# Altium PCB PCB1.PcbDoc
Units mm, origin at the board's own origin, x right, y up, seen from the top; angles counter-clockwise.
Board outline 49.15 x 37.72 mm, 2 copper layers (Top Layer, Bottom Layer); 17 components, 15 nets, 62 pads, 5 vias.
Unrouted connection lines stored in the file: 6.
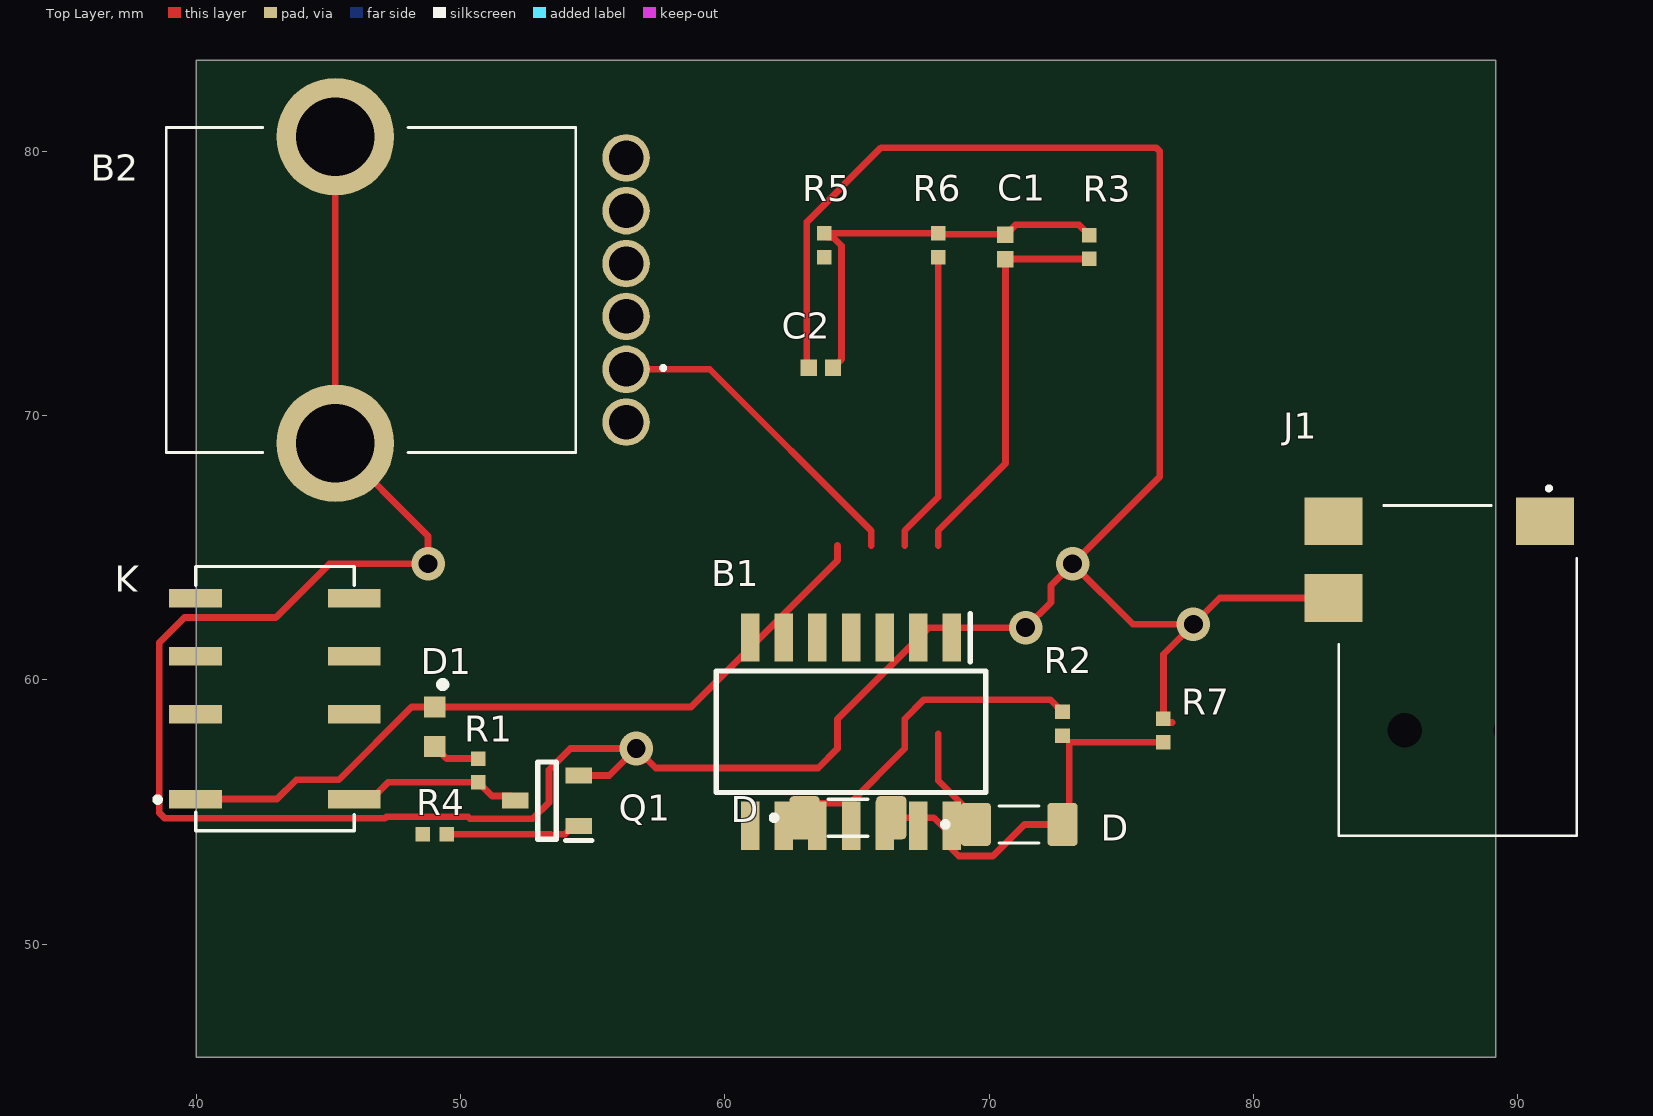
[diagram p0: Top Layer view]
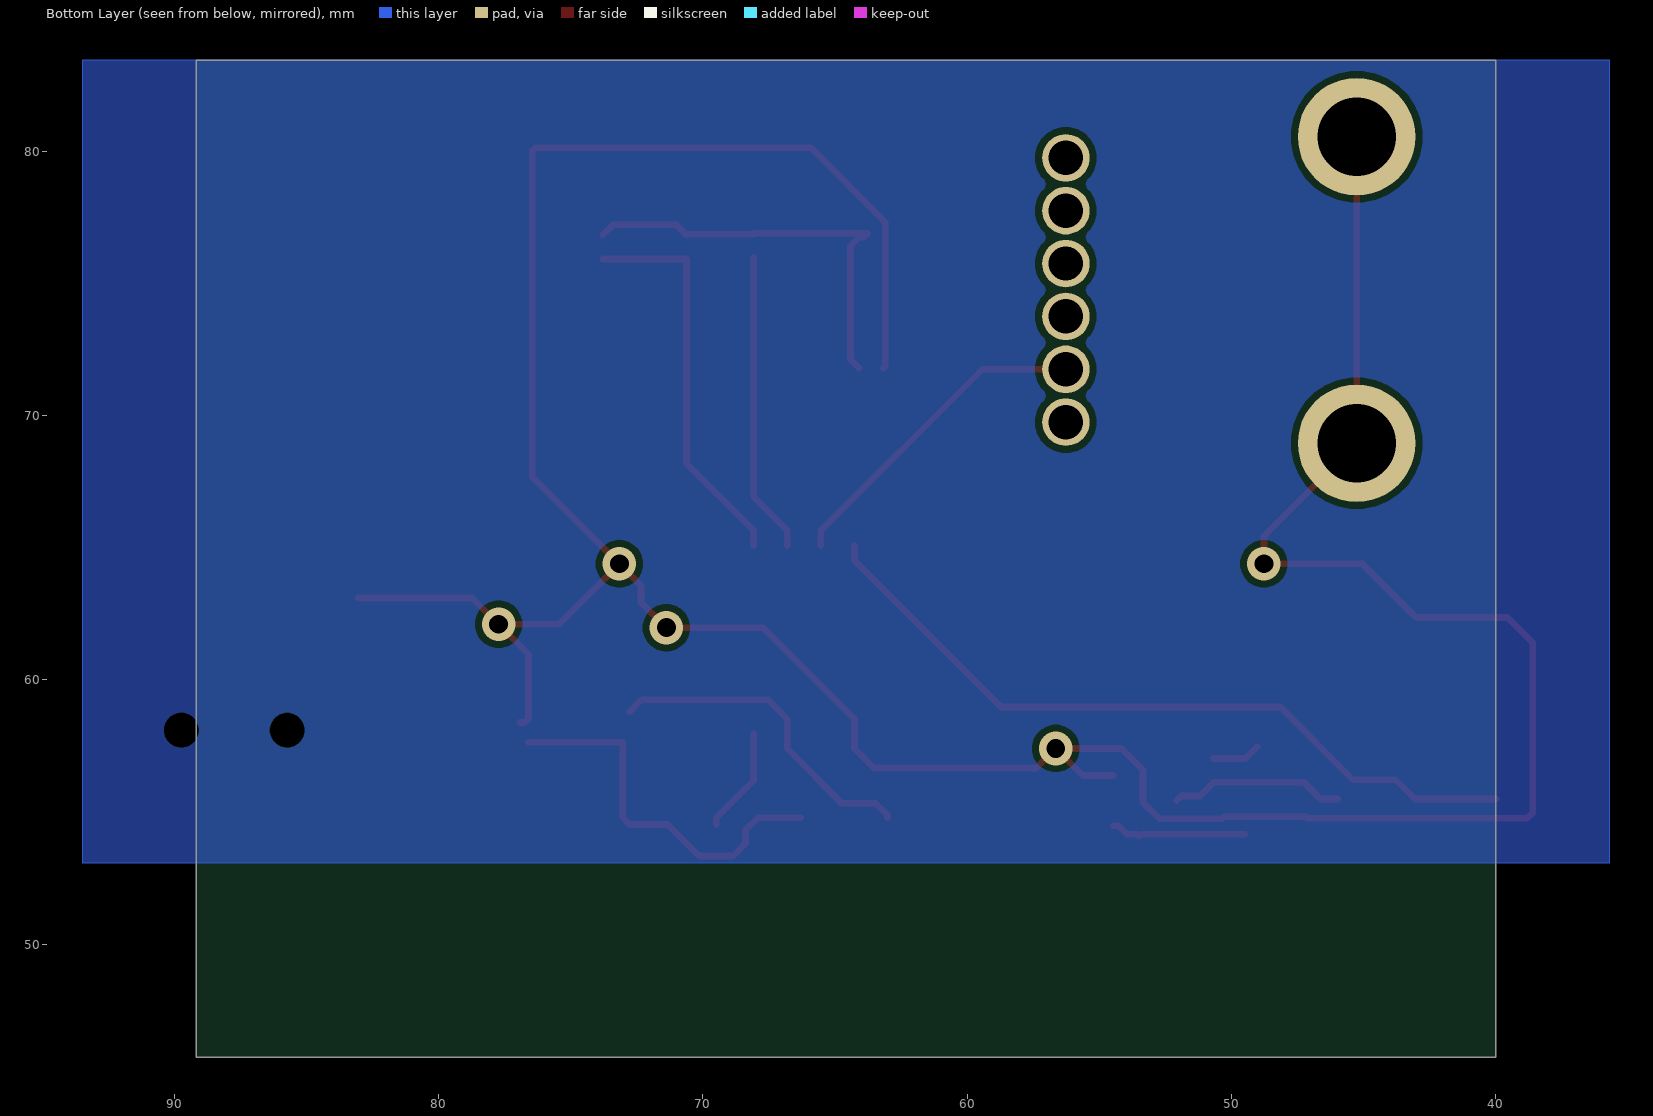
[diagram p1: Bottom Layer view, seen from below]

## Layer stack, top to bottom
Top Solder: solder mask 0.0102, Solder Resist, Dk 3.5
Top Layer: signal copper 0.0356
Dielectric 1: dielectric 0.32, FR-4, Dk 4.8
Bottom Layer: signal copper 0.0356
Bottom Solder: solder mask 0.0102, Solder Resist, Dk 3.5

## Board outline
40.005,45.72 40.005,83.439 89.154,83.439 89.154,45.72

## Design rules (kind name [scope] priority, off if disabled: settings)
Clearance [All] p1: gap=0.254 ignorepadtopadclearanceinfootprint=FALSE except(0: Arc-Hole Track-Hole SMDPad-Hole THPad-Hole Via-Hole Fill-Hole Poly-Hole Region-Hole Text-Hole; 0.258: Arc-Via Track-Via; 0.26: Arc-Fill Arc-Poly Arc-Region Track-Fill Track-Poly Track-Region; 0.3: Arc-Arc Arc-Track Track-Track)
PolygonConnect [All] p1: connectstyle=Relief reliefconductorwidth=0.254 reliefentries=4 polygonreliefangle="90 Angle" airgapwidth=0.254
RoomDefinition Sheet1 [InComponentClass('Sheet1')] p1: confinementstyle=ConfineIn formatcopy=TRUE lockcomponents=FALSE outline 35.745,53.203 93.599,53.203 93.599,83.566 35.745,83.566
RoutingVias [All] p1: holewidth=0.711 width=1.27 viastyle="Through Hole" minholewidth=0.711 minwidth=1.27 maxholewidth=0.711 maxwidth=1.27
SolderMaskExpansion [All] p1: expansion=0.102 istentingtop=FALSE
SupplyNets "Schematic Supply Nets_4" [InNet('GND')] p1: voltage=0.000
SupplyNets "Schematic Supply Nets_3" [InNet('+5')] p2: voltage=0.000
SupplyNets "Schematic Supply Nets_2" [InNet('VCC')] p3: voltage=0.000
SupplyNets "Schematic Supply Nets_1" [InNet('V')] p4: voltage=0.000
SupplyNets "Schematic Supply Nets" [InNet('VIN')] p5: voltage=0.000
Width [All] p1: maxlimit=0.254 minlimit=0.254 preferedwidth=0.254
30 further rules are at their usual default settings.

## Classes and differential pairs
component class Sheet1: B1 B2 C1 C2 D D1 J1 K Q1 R1 R2 R3 R4 R5 R6 R7

## Components (designator, comment, footprint, x,y, rotation, side; value= is the part's Value field where it differs from the comment)
B1 "LM324NSR" SOIC127P780X200-14N 64.77,58.039 r270 top
B2 "PTV112-4420A-B104" PTV1124420AB104 56.26,71.75 r90 top
C1 "100pF" CAPC1005X06N 70.611,76.374 r270 top
C2 "330pF" CAPC1005X06N 63.626,71.802 r180 top
D "FDLL4148" DIOMELF3414N 71.13,54.53 r0 top
D "FDLL4148" DIOMELF3414N 64.653,54.784 r0 top
D1 "LED-GREEN" SMD-1608-LED 49.021,58.224 r270 top
J1 "ADC-028-1-T/R" PJ1021SMTTR 87.724,60.347 r90 top
K "IM06GR" RELAY_IM06GR 42.973,59.291 r0 top
Q1 "BCW66GLT3G" SOT96P237X111-3N 53.269,55.43 r180 top
R1 "1K" RESC1005X06N 50.672,56.573 r90 top
R2 "82K" RESC1005X06N 72.77,58.34 r270 top
R3 "6,81K" RESC1005X06N 73.786,76.374 r270 top
R4 "600R" RESC1005X06N 49.021,54.16 r0 top
R5 "6,81K" RESC1005X06N 63.753,76.443 r90 top
R6 "11,3k" RESC1005X06N 68.071,76.443 r270 top
R7 "15k" RESC1005X06N 76.591,58.086 r270 top

## Footprints (in the part's own frame and the unit in brackets; to place one, negate y for a bottom-side part, rotate by r counter-clockwise, add the part's x,y. Pads: shape width x height; smd on the part's side, far side on the other; paste and mask are expansions set on the pad)
CAPC1005X06N [mm] "Chip Capacitor, 2-Leads, Body 1,00x0,50mm, IPC Medium Density"
  rect 0.62x0.62 smd: 1(-0.46,0) 2(0.46,0)
  body extent -0.53,-0.28 0.53,0.28, height 0.55
DIOMELF3414N [mm]
  rrect25% 1.14x1.63 smd: A(1.64,0) C(-1.64,0)
  silkscreen extent -2.89,-0.7 0.75,0.7, body extent -1.78,-0.75 1.82,0.75, height 1.44
PJ1021SMTTR [mm]
  rect 1.8x2.2 smd: 1(5.65,-3.3) 2(2.75,4.7) 3(5.65,4.7)
  round 0.65 hole 1.3 unplated: MH1(-2.25,-2) MH2(-2.25,2)
  silkscreen extent -6.25,-4.5 6.95,4.5, body extent -6.12,-3.94 6.38,5.46, height 6.01
PTV1124420AB104 [mm]
  round 1.8 hole 1.3: A1(0,0) A2(-2,0) A3(8,0) B1(2,0) B2(4,0) B3(6,0)
  round 4.455 hole 2.97: MH1(-2.8,11) MH2(8.8,11)
  silkscreen extent -3.15,-1.45 9.15,17.4, body extent -4.17,-0.55 10.19,17.4, height 20.6
RELAY_IM06GR [mm]
  rect 2x0.7 smd: 1(-3,-3.8) 2(-3,-0.6) 3(-3,1.6) 4(-3,3.8) 5(3,3.8) 6(3,1.6) 7(3,-0.6) 8(3,-3.8)
  silkscreen extent -4.54,-5 3,5, body extent -3.75,-5 3.75,5, height 5.65
RESC1005X06N [mm] "Chip Resistor, 2-Leads, Body 1,00x0,50mm, IPC Medium Density"
  rect 0.55x0.55 smd: 1(-0.45,0) 2(0.45,0)
  body extent -0.53,-0.28 0.53,0.28, height 0.55
SMD-1608-LED [mm]
  rect 0.8x0.8 smd paste+0 mask+0: 1(-0.75,0) 2(0.75,0)
  silkscreen extent -1.72,0.18 -1.48,0.43, body extent -1.25,-0.55 1.25,0.55, height 0.25
SOIC127P780X200-14N [mm]
  rect 1.825x0.7 smd: 1(-3.562,3.81) 2(-3.562,2.54) 3(-3.562,1.27) 4(-3.562,0) 5(-3.562,-1.27) 6(-3.562,-2.54) 7(-3.562,-3.81) 8(3.562,-3.81) 9(3.562,-2.54) 10(3.562,-1.27) 11(3.562,0) 12(3.562,1.27) 13(3.562,2.54) 14(3.562,3.81)
  silkscreen extent -4.47,-5.1 2.3,5.1, body extent -3.9,-5.1 3.9,5.1, height 2
SOT96P237X111-3N [mm]
  rect 1x0.6 smd: 1(-1.2,0.955) 2(-1.2,-0.955) 3(1.2,0)
  silkscreen extent -1.7,-1.46 0.35,1.51, body extent -1.18,-1.46 1.18,1.46, height 1.11

## Part data
B1: "Quadruple Operational Amplifier", Manufacturer_Name="Texas Instruments", Mouser Part Number=595-LM324NSR, Arrow Part Number=LM324NSR, Arrow Price/Stock=https://www.arrow.com/en/products/lm324nsr/texas-instruments?utm_currency=USD&region=nac, Datasheet Link=http://www.ti.com/lit/gpn/LM324, Geometry.Height=2mm, Manufacturer_Part_Number=LM324NSR, Mouser Price/Stock=https://www.mouser.co.uk/ProductDetail/Texas-Instruments/LM324NSR?qs=VBduBm9rCJQcjq4eh95DkA%3D%3D
B2: "Potentiometers PANEL CONTROL 100kOhm", Manufacturer_Name=Bourns, Mouser Part Number=652-PTV1124420AB104, Datasheet Link=https://www.bourns.com/docs/Product-Datasheets/PTVPTT.pdf, Geometry.Height=20.5mm, Manufacturer_Part_Number=PTV112-4420A-B104, Mouser Price/Stock=https://www.mouser.co.uk/ProductDetail/Bourns/PTV112-4420A-B104?qs=nqw9FAyaR8PT4wHHFlLdhA%3D%3D
C1 C2: library part Capacitor
D D: "Diode Standard 100V 200mA Surface Mount SOD-80", Package="SOD-80-2 ON Semiconductor", Digi-Key_Part_Number=FDLL4148CT-ND, DigiKey-Purchase-URL=https://snapeda.com/shop?store=DigiKey&id=2783433, MF="ON Semiconductor", Mouser-Purchase-URL=https://snapeda.com/shop?store=Mouser&id=2783433, MP=FDLL4148, SnapEDA_Link=https://www.snapeda.com/parts/FDLL4148/ON%20Semiconductor/view-part/2783433/?ref=snap
D1: "LED GREEN CLEAR CHIP SMD LTST-C190GKT", Case Code (Imperial)=0603, Case Code (Metric)=1608, Color=Green, Forward Current=30mA, Forward Voltage=2.1V, Lens Color=Colorless, Max Operating Temperature=85°C, Min Operating Temperature=-55°C, Package Quantity=1, Power Dissipation=100mW, Reverse Voltage=5V, Test Current=10mA, Voltage=2V, Case/Package=0603, Depth=0.8mm, Dominant Wavelength=569nm, Height=0.8mm, Illumination Color=Green, Lead Free="Lead Free", Length=1.6mm, Lens Style=Clear, Lens Transparency=Clear, Luminous Intensity=6mcd, Mount="Surface Mount", Number of Elements=1, Number of LEDs=1, Number of Pins=2, Packaging="Tape and Reel", Power Rating=100mW, Radiation Hardening=No, Viewing Angle=130°, Wavelength=565nm, Width=0.8mm
J1: "Connecteurs d'alimentation continue DC POWER JACK 2MM PIN TYPE 028", Manufacturer_Name="Same Sky", Mouser Part Number=737-ADC-028-1-T/R, Geometry.Height=6mm, Manufacturer_Part_Number=ADC-028-1-T/R, Mouser Price/Stock=https://www.mouser.fr/ProductDetail/Adam-Tech/ADC-028-1-T-R?qs=TTVbHWoAP%2FSiqsZeR9Co0Q%3D%3D
K: "Electromechanical Relay 12VDC 1.029KOhm 2A DPDT _10x7.5x5.65_mm SMD Signal Relay", Package=None, Availability=Unavailable, MF="TE Connectivity", MP=IM06GR, Price=None, SnapEDA_Link=https://www.snapeda.com/parts/IM06GR/TE%20Connectivity%20Potter%20%26%20Brumfield%20Relays/view-part/264147/?ref=snap, TE_purchase_URL=https://www.te.com/usa-en/product-2-1462037-3.html?te_bu=Cor&te_type=disp&te_campaign=seda_glo_cor-seda-global-disp-prtnr-fy19-seda-model-bom-cta_sma-317_1&elqCampaignId=32493
Q1: "NPN Bipolar Transistor", Manufacturer_Name=onsemi, Mouser Part Number=863-BCW66GLT3G, Arrow Part Number=BCW66GLT3G, Arrow Price/Stock=https://www.arrow.com/en/products/bcw66glt3g/on-semiconductor?region=europe, Datasheet Link=http://www.onsemi.com/pub/Collateral/BCW66GLT1-D.PDF, Geometry.Height=1.11mm, Manufacturer_Part_Number=BCW66GLT3G, Mouser Price/Stock=https://www.mouser.co.uk/ProductDetail/onsemi/BCW66GLT3G?qs=XfkxeqX9xWXeTiewInI3Nw%3D%3D
R1 R2 R3 R4 R5 R6 R7: library part Resistor

## Via types
v1: diameter 1.27, hole 0.711, Top Layer to Bottom Layer, 5 vias

## Nets (pads, with @x,y where several pads share a name; then routed paths per layer and width w, separated by ;. In a path a pad name is that pad's centre, name@x,y a point inside that pad or via, vN(x,y) a via of type N, cw(c..) or ccw(c..) an arc to the next point about the centre after c; other vN are vias at no path point)
+5: J1.1
GND: B1.11 B2.MH1 B2.MH2 C2.2 J1.2 Q1.2 R7.1 | length 131.9
  Top Layer w0.254: B2.MH2 B2.MH1 48.768,65.442 v1(48.768,64.389) 45.038,64.389 43.009,62.36 39.553,62.36 38.592,61.399 38.592,54.983 38.815,54.76 47.131,54.76 47.187,54.816 50.283,54.816 50.35,54.749 52.727,54.749 53.341,55.363 53.341,56.596 54.149,57.404 v1(56.642,57.404) ; Q1.2 55.623,56.385 v1(56.642,57.404) ; C2.2 63.097,71.871 63.097,77.326 65.908,80.137 76.305,80.137 76.454,79.988 76.454,67.691 v1(73.152,64.389) ; 76.928,58.388 76.739,58.388 R7.1 76.591,60.97 v1(77.724,62.103) ; J1.2 78.718,63.097 v1(77.724,62.103) ; v1(56.642,57.404) 57.381,56.665 63.53,56.665 64.261,57.396 64.261,57.959 64.261,58.521 67.716,61.976 v1(71.374,61.976) 72.332,62.934 72.332,63.569 v1(73.152,64.389) ; v1(73.152,64.389) 75.438,62.103 v1(77.724,62.103)
NetB1_1: B1.1 C1.2 R3.2 | length 15.1
  Top Layer w0.254: 68.071,65.083 68.071,65.645 70.611,68.185 C1.2 70.616,75.919 73.781,75.919 R3.2
NetB1_2: B1.2 R6.2 | length 11.4
  Top Layer w0.254: 66.801,65.083 66.801,65.645 68.071,66.915 R6.2
NetB1_3: B1.3 B2.A1 | length 12.4
  Top Layer w0.254: B2.A1 59.426,71.75 65.531,65.645 65.531,65.083
NetB1_13: B1.13 D.C@63.013,54.784 R2.1 | length 12.5
  Top Layer w0.254: D.C@63.013,54.784 63.013,54.888 63.455,55.329 64.734,55.329 66.801,57.396 66.801,57.959 66.801,58.521 67.532,59.252 72.307,59.252 R2.1
NetB1_14: B1.14 D.C@69.49,54.53 | length 4
  Top Layer w0.254: 68.071,57.959 68.071,56.194 69.49,54.775 D.C@69.49,54.53
NetC1_1: C1.1 C2.1 R3.1 R5.2 R6.1 | length 16
  Top Layer w0.254: C2.1 64.409,72.125 64.409,76.426 64.09,76.745 63.901,76.745 R5.2 R6.1 68.1,76.863 70.581,76.863 C1.1 70.993,77.216 73.394,77.216 R3.1
NetD1_2: D1.2 R1.2 | length 1.8
  Top Layer w0.254: D1.2 49.472,57.023 R1.2
NetD_A: D.A R2.2 R7.2 | length 14.6
  Top Layer w0.254: D.A@66.293,54.784 67.904,54.784 68.375,54.313 68.375,53.805 68.846,53.334 70.134,53.334 71.33,54.53 72.77,54.53 73.024,54.784 73.024,57.636 R7.2
NetK_8: K.8 Q1.3 R1.1 | length 6.6
  Top Layer w0.254: K.8 46.623,55.491 47.255,56.123 R1.1 51.192,55.603 51.896,55.603 Q1.3
NetQ1_1: Q1.1 R4.2 | length 5.2
  Top Layer w0.254: R4.2 53.413,54.16 53.494,54.079 53.575,54.16 53.954,54.16 54.269,54.475 Q1.1
V: R4.1
VCC: B1.4 D1.1 K.1 | length 28.6
  Top Layer w0.254: K.1 43.055,55.491 43.786,56.222 45.393,56.222 48.145,58.974 D1.1 58.714,58.974 64.261,64.52 64.261,65.083
VIN: R5.1
pads on no net: B1.5 B1.6 B1.7 B1.8 B1.9 B1.10 B1.12 B2.A2 B2.A3 B2.B1 B2.B2 B2.B3 J1.3 J1.MH1 J1.MH2 K.2 K.3 K.4 K.5 K.6 K.7

## Polygon pours and split planes (outlines as drawn)
GND on Bottom Layer "NONET_L-01_P-001" (solid, pour order 1): 35.687,83.439 93.472,83.439 93.472,53.086 35.687,53.086
no net on Bottom Layer "NONET_L-01_P-001" (solid, pour order 0): 35.687,83.439 93.472,83.439 93.472,56.769 93.472,53.086 35.687,53.086

## Silkscreen, mask and mechanical layers (free items; w line width, h text height)
Mechanical 1:
  lines w0.254: 37.211,53.594 92.329,53.594 92.329,83.185 37.211,83.185 37.211,53.594